# Altium PCB ultrasounic.PcbDoc
Units mil, origin at the board's own origin, x right, y up, seen from the top; angles counter-clockwise.
Board outline 2965 x 1700 mil, 4 copper layers (Top Layer, Mid-Layer 1, Mid-Layer 2, Bottom Layer); 89 components, 55 nets, 285 pads, 123 vias.
Unrouted connection lines stored in the file: 1.
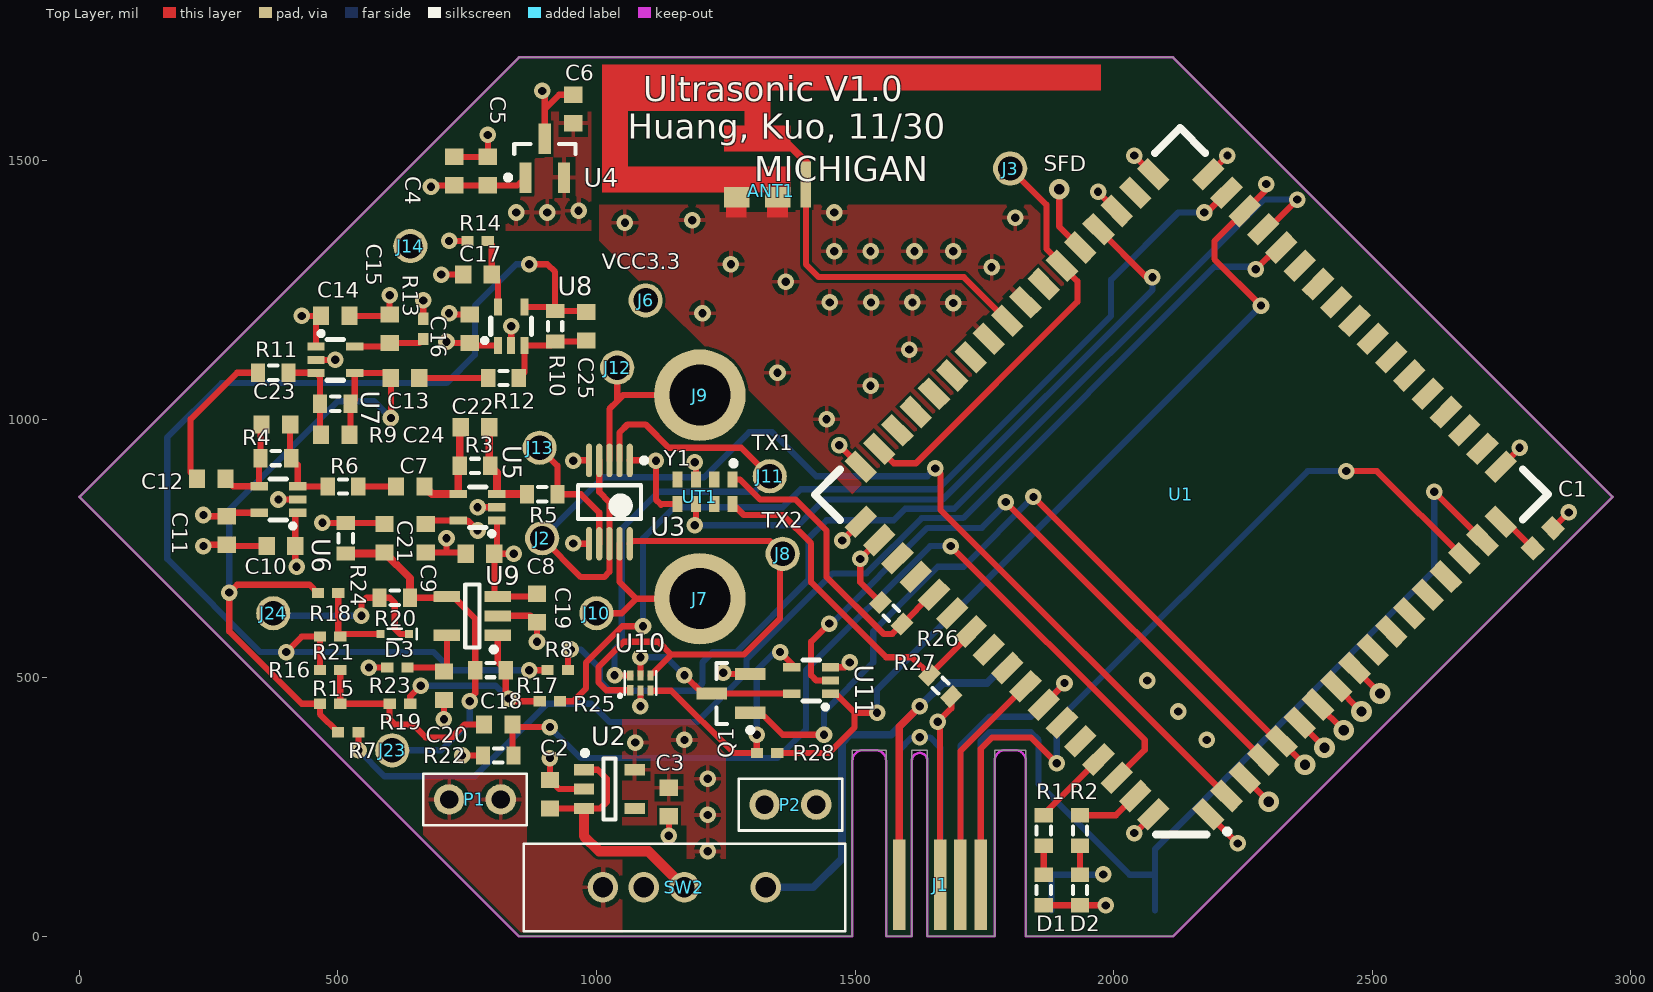
[diagram p0: Top Layer view]
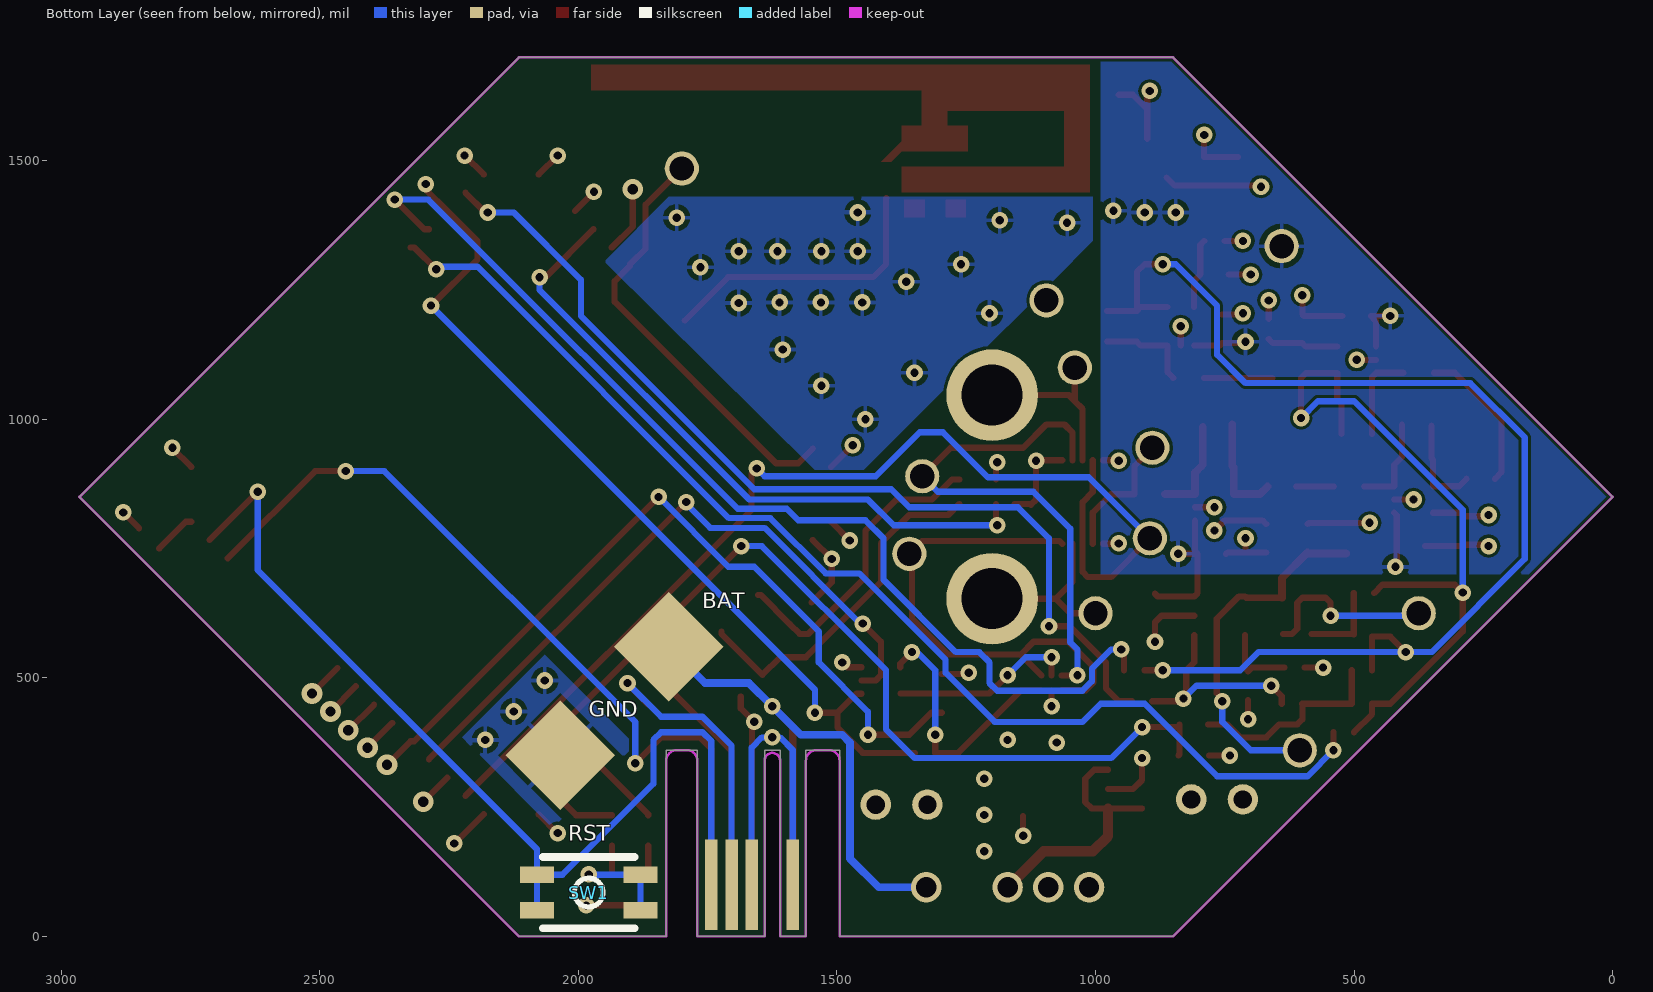
[diagram p1: Bottom Layer view, seen from below]
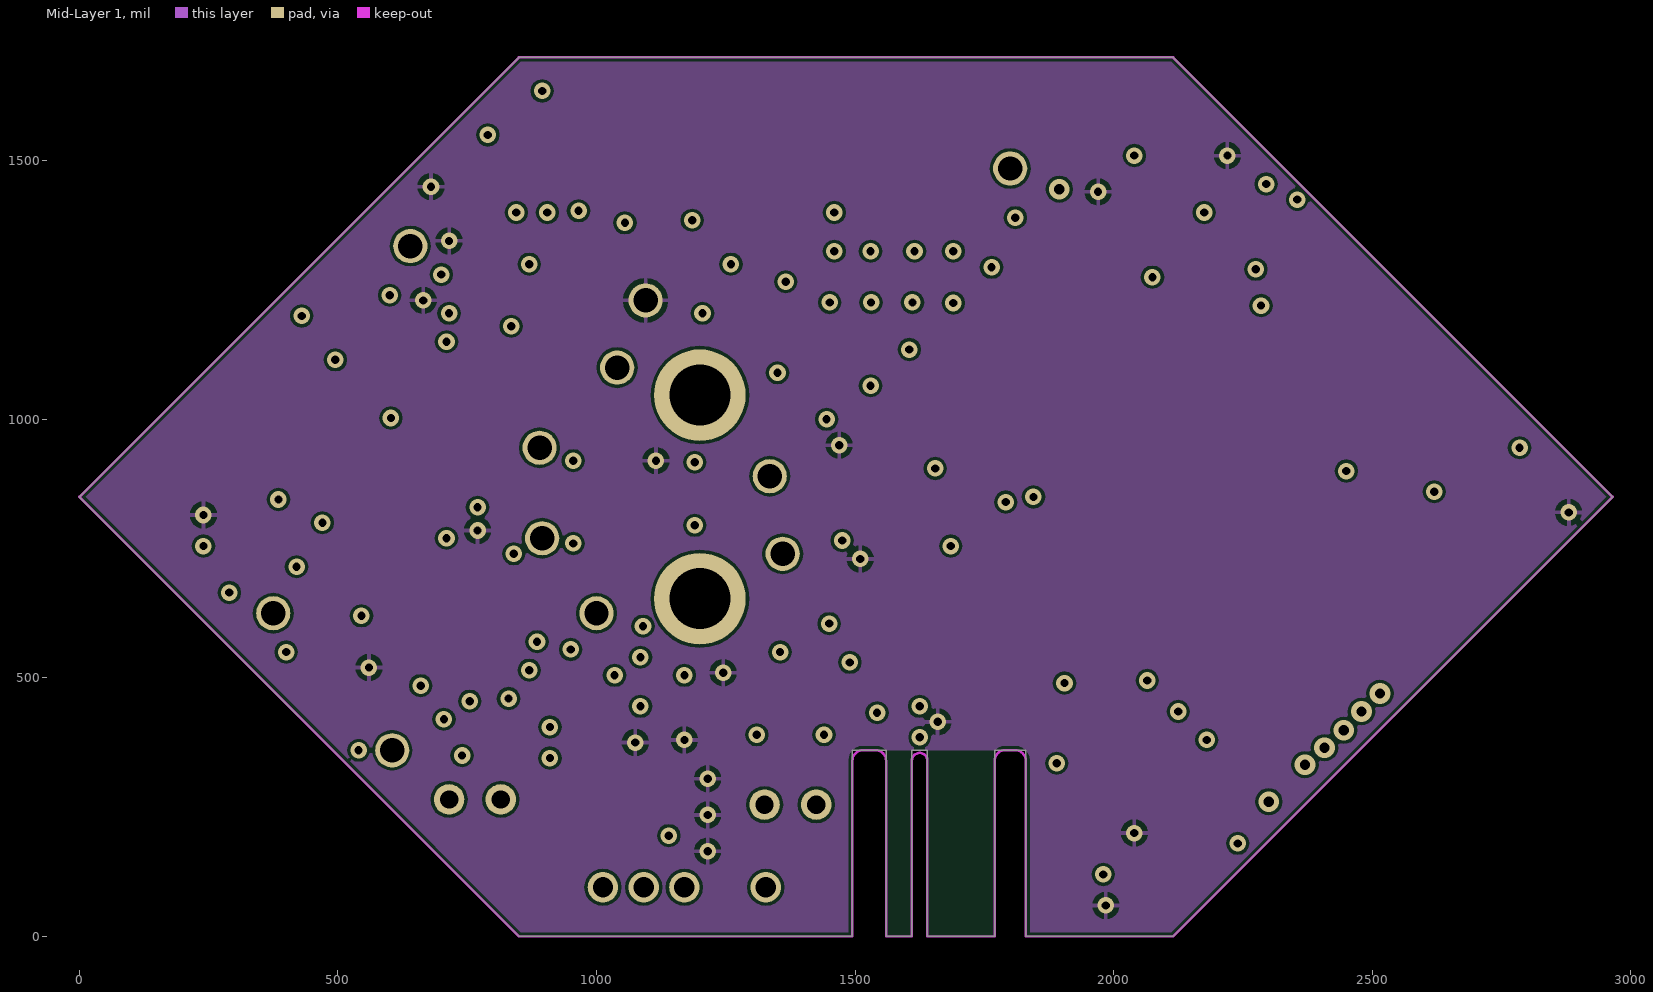
[diagram p2: Mid-Layer 1]
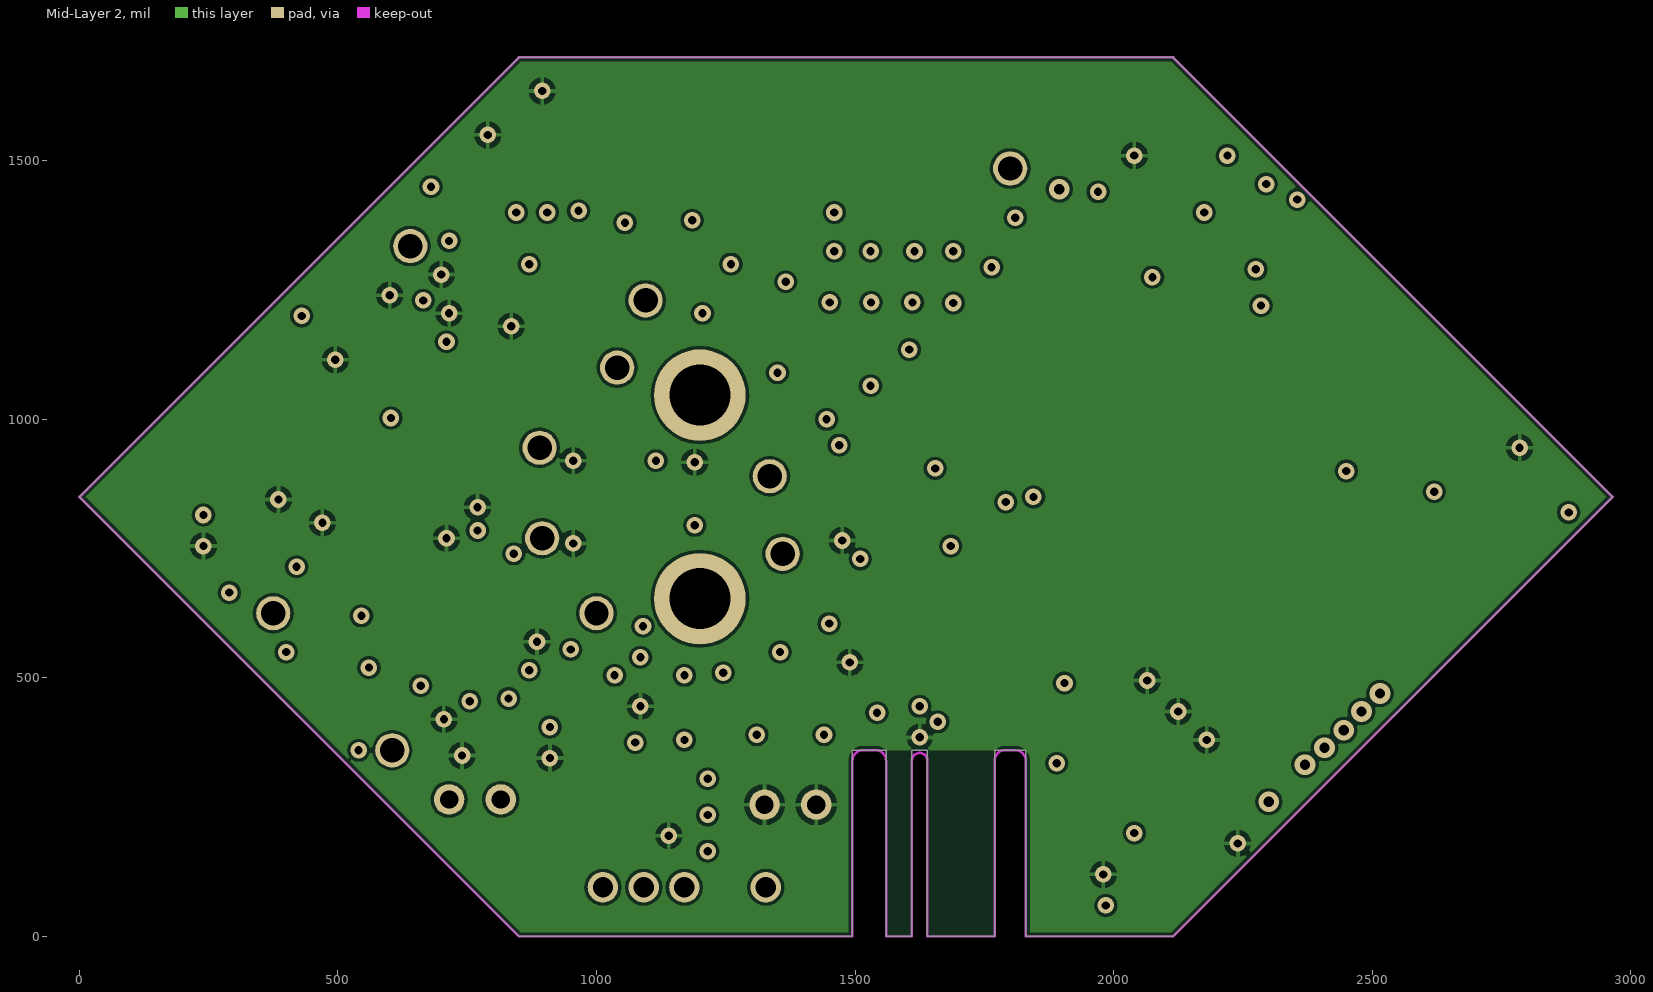
[diagram p3: Mid-Layer 2]

## Layer stack, top to bottom
Top Layer: signal copper 1.4
Dielectric: core 12.6, FR-4, Dk 4.8
Mid-Layer 1: signal copper 1.4
Dielectric: prepreg 12.6, FR-4, Dk 4.8
Mid-Layer 2: signal copper 1.4
Dielectric: core 12.6, FR-4, Dk 4.8
Bottom Layer: signal copper 1.4

## Board outline
0,850 850,0 1495,0 1495,360 1560,360 1560,0 1610,0 1610,360 1640,360 1640,0 1770,0 1770,360 1830,360 1830,0 2115,0 2965,850 2115,1700 850,1700

## Design rules (kind name [scope] priority, off if disabled: settings)
Clearance "Clearance~Sunstone Circuits" [All] p1: gap=6 // Sunstone Circuits Minimum Clearance Rule (MLB~4&6 Layer Designs)
HoleSize "HoleSize~Sunstone Circuits" [All] p1: absolutevalues=TRUE maxlimit=251 minlimit=8 maxpercent=80.000 minpercent=20.000 // Sunstone Circuits Hole Size Rule (MLB~4&6 Layer Designs)
HoleSize Testpoint [All] p2: absolutevalues=TRUE maxlimit=100 minlimit=1 maxpercent=80.000 minpercent=20.000
HoleSize TestPointUsage [All] p3: absolutevalues=TRUE maxlimit=100 minlimit=1 maxpercent=80.000 minpercent=20.000
MinimumAnnularRing "MinimumAnnularRing~Sunstone Circuits" [All] p1: minimumring=7 // Sunstone Circuits Minimum Annular Ring (MLB~4&6 Layer Designs)
PlaneClearance "PlaneClearance~Sunstone Circuits" [All] p1: clearance=12 // Sunstone Circuits Power Plane Clearance Rule (MLB~4&6 Layer Designs)
PlaneConnect "PlaneConnect~Sunstone Circuits" [All] p1: planeconnectstyle=Relief reliefexpansion=10 reliefentries=4 reliefconductorwidth=8 reliefairgap=10 // Sunstone Circuits Power Plane Connect Rule (MLB~4&6 Layer Designs)
PolygonConnect "PolygonConnect~Sunstone Circuits" [All] p1: connectstyle=Relief reliefconductorwidth=8 reliefentries=4 polygonreliefangle="90 Angle" airgapwidth=10 // Sunstone Circuits Polygon Connect Style (MLB~4&6 Layer Designs)
RoomDefinition ultrasounic_tx [InComponentClass('ultrasounic_tx')] p1 off: confinementstyle=ConfineIn formatcopy=TRUE lockcomponents=FALSE outline 1029.65,449.41 1029.65,527.41 1129.29,527.41 1129.29,546.93 1540.71,546.93 1540.71,385.2 1379.21,385.2 1379.21,321.38 1260.79,321.38 1260.79,385.2 1129.29,385.2 1129.29,449.41
RoomDefinition ultrasounic_rx [InComponentClass('ultrasounic_rx')] p2 off: confinementstyle=ConfineIn formatcopy=TRUE lockcomponents=FALSE outline 195.79,851.38 195.79,918.62 210.4,918.62 210.4,1034.9 315.79,1034.9 315.79,1123.62 427.87,1123.62 427.87,1185.12 435.79,1185.12 435.79,1233.62 566.38,1233.62 566.38,1234.21 710.79,1234.21 710.79,1313.62 722.6,1313.62 722.6,1370.75 817.4,1370.75 817.4,1359.9 930,1359.9 930,1239.21 953.62,1239.21 953.62,1124.9 990,1124.9 990,1005.1 985,1005.1 985,440.1 869.21,440.1 869.21,316.38 665,316.38 665,300.1 545.4,300.1 545.4,424.25 437.6,424.25 437.6,554.25 437.6,565.1 315.4,565.1 315.4,725.79 251.38,725.79 251.38,851.38
RoomDefinition ultrasounic [InComponentClass('ultrasounic')] p3 off: confinementstyle=ConfineIn formatcopy=TRUE lockcomponents=FALSE outline 580.4,1275.1 580.4,1394.9 691.38,1394.9 691.38,1539.21 809.29,1539.21 809.29,1593.74 921.38,1593.74 921.38,1659.21 988.62,1659.21 988.62,1352.13 1701.15,1352.13 1701.15,351.76 698.84,351.76 698.84,1275.1
RoomDefinition power [InComponentClass('power')] p4 off: confinementstyle=ConfineIn formatcopy=TRUE lockcomponents=FALSE outline 652.5,202.5 652.5,327.5 876.38,327.5 876.38,334.21 936.26,334.21 936.26,374.72 1035.4,374.72 1035.4,1289.9 1155,1289.9 1155,319.21 1173.62,319.21 1173.62,317.5 1487.5,317.5 1487.5,192.01 1493.39,192.01 1493.39,-2.01 846.61,-2.01 846.61,202.5
RoomDefinition epic [InComponentClass('epic')] p5 off: confinementstyle=ConfineIn formatcopy=TRUE lockcomponents=FALSE outline 835.4,710.1 835.4,829.9 1000.83,829.9 1000.83,1695.59 1985.39,1695.59 1985.39,1589.64 2882.36,1589.64 2882.36,835.64 2895.64,835.64 2895.64,704.36 2882.36,704.36 2882.36,103.34 2126.07,103.34 2126.07,-1.4 1833.93,-1.4 1833.93,-0.5 1560.62,-0.5 1560.62,103.34 1396.06,103.34 1396.06,545.1 1325.4,545.1 1325.4,710.1
RoutingVias "RoutingVias~Sunstone Circuits" [All] p1: holewidth=16 width=30 viastyle="Through Hole" minholewidth=8 minwidth=24 maxholewidth=20 maxwidth=40 // Sunstone Circuits Routing Vias Rule (MLB~4&6 Layer Designs)
ShortCircuit "ShortCircuit~Sunstone Circuits" [All] p1: allowed=FALSE // Sunstone Circuits Short Circuit Rule~Do Not Allow (MLB~4&6 Layer Designs)
SilkscreenOverComponentPads [All] p1: minsilkscreentomaskgap=10
SolderMaskExpansion "SolderMaskExpansion~Sunstone Circuits_1" [IsVia] p1: expansion=-20 // Sunstone Circuits Solder Mask Expansion Rule (MLB~4&6 Layer Designs)
SolderMaskExpansion "SolderMaskExpansion~Sunstone Circuits" [All] p2: expansion=3 // Sunstone Circuits Solder Mask Expansion Rule (MLB~4&6 Layer Designs)
ViasUnderSMD "ViasUnderSMD~Sunstone Circuits" [All] p1: allowed=FALSE // Sunstone Circuits Vias Under SMD~Do Not Allow (MLB~4&6 Layer Designs)
Width "Width~Sunstone Circuits" [All] p1: maxlimit=100 minlimit=6 preferedwidth=10 // Sunstone Circuits Minimum Width Rule (MLB~4&6 Layer Designs)
23 further rules are at their usual default settings.

## Classes and differential pairs
component class ultrasounic: C4 C5 C6 J7 J8 J9 J10 J11 J12 J13 J14 U3 U4 UT1
component class ultrasounic_tx: Q1 R28 U10 U11
component class ultrasounic_rx: C7 C8 C9 C10 C11 C12 C13 C14 C15 C16 C17 C18 C19 C20 C21 C22 C23 C24 C25 D3 J23 J24 R3 R4 R5 R6 R7 R8 R9 R10 R11 R12 R13 R14 R15 R16 R17 R18 R19 R20 R21 R22 R23 R24 R25 U5 U6 U7 U8 U9
component class power: C2 C3 J6 P1 P2 SW2 U2
component class epic: ANT1 C1 D1 D2 J1 J2 J3 R1 R2 R26 R27 SW1 U1 Y1

## Components (designator, comment, footprint, x,y, rotation, side; value= is the part's Value field where it differs from the comment)
ANT1 "2.4GHz PCB Antenna" PIFA-2.4GHz 1375,1410 r90 top
C1 "Cap Semi" 1608[0603] 2830,770 r225 top
C2 "Cap Semi" 1608[0603] 910,275 r270 top
C3 "Cap Semi" 1608[0603] 1140,260 r90 top
C4 "Cap Semi" 1608[0603] 725,1480 r270 top
C5 "Cap Semi" 1608[0603] 790,1480 r270 top
C6 "Cap Semi" 1608[0603] 955,1600 r270 top
C7 "Cap Semi" 1608[0603] 640,870 r0 top
C8 "Cap Semi" 1608[0603] 775,740 r0 top
C9 "Cap Semi" 1608[0603] 670,770 r90 top
C10 "Cap Semi" 1608[0603] 390,755 r0 top
C11 "Cap Semi" 1608[0603] 285,785 r90 top
C12 "Cap Semi" 1608[0603] 255,885 r0 top
C13 "Cap Semi" 1608[0603] 630,1080 r180 top
C14 "Cap Semi" 1608[0603] 495,1200 r180 top
C15 "Cap Semi" 1608[0603] 600,1175 r270 top
C16 "Cap Semi" 1608[0603] 755,1175 r270 top
C17 "Cap Semi" 1608[0603] 770,1280 r0 top
C18 "Cap Semi" 1608[0603] 810,410 r180 top
C19 "Cap Semi" 1608[0603] 885,635 r90 top
C20 "Cap Semi" 1608[0603] 705,485 r90 top
C21 "Cap Semi" 1608[0603] 590,770 r270 top
C22 "Cap Semi" 1608[0603] 765,985 r0 top
C23 "Cap Semi" 1608[0603] 380,990 r0 top
C24 "Cap Semi" 1608[0603] 495,970 r180 top
C25 "Cap Semi" 1608[0603] 980,1180 r270 top
D1 "LED3" J1-0603 1865,90 r90 top
D2 "LED3" J1-0603 1935,90 r90 top
D3 "Diode" SOD523 610,585 r180 top
J1 "EPIC_PROG_EDGE" EPIC_PROG_EDGE 1625,100 r0 top
J2 "5004" TestPoint 895,770 r0 top
J3 "5004" TestPoint 1800,1485 r0 top
J6 "5004" TestPoint 1095,1230 r0 top
J7 "ED90088" "0360 SER" 1200,653.15 r0 top
J8 "5004" TestPoint 1360,740 r0 top
J9 "ED90088" "0360 SER" 1200,1046.85 r0 top
J10 "5004" TestPoint 1000,625 r0 top
J11 "5004" TestPoint 1335,890 r0 top
J12 "5004" TestPoint 1040,1100 r0 top
J13 "5004" TestPoint 890,945 r0 top
J14 "5004" TestPoint 640,1335 r0 top
J23 "5004" TestPoint 605,360 r0 top
J24 "5004" TestPoint 375,625 r0 top
P1 "1 x 2 header" "1x2 header" 765,265 r180 top
P2 "1 x 2 header" "1x2 header" 1375,255 r180 top
Q1 "ZXM61P03" SOT23-3N 1260,470 r180 top
R1 "470" J1-0603 1865,205 r270 top
R2 "470" J1-0603 1935,205 r270 top
R3 "1Meg" J1-0603 765,910 r180 top
R4 "1Meg" J1-0603 380,925 r180 top
R5 "100K" J1-0603 895,855 r180 top
R6 "100K" J1-0603 510,870 r180 top
R7 "0" 0402 520,395 r0 top
R8 "0" 0402 925,515 r0 top
R9 "1Meg" J1-0603 495,1030 r0 top
R10 "1Meg" J1-0603 920,1180 r90 top
R11 "100K" J1-0603 375,1090 r0 top
R12 "100K" J1-0603 820,1080 r0 top
R13 "0" 0402 665,1175 r90 top
R14 "0" 0402 770,1345 r180 top
R15 "0" 0402 485,450 r0 top
R16 "0" 0402 485,515 r0 top
R17 "0" J1-0603 795,515 r0 top
R18 "0" 0402 480.98,663.99 r180 top
R19 "0" 0402 620,450 r180 top
R20 "0" J1-0603 610,655 r180 top
R21 "0" 0402 485,580 r180 top
R22 "0" J1-0603 810,350 r0 top
R23 "0" 0402 615,520 r180 top
R24 "0" J1-0603 515,770 r270 top
R25 "0" 0402 910,455 r0 top
R26 "10K" J1-0603 1665,485 r135 top
R27 "10K" J1-0603 1570,625 r315 top
R28 "0" 0402 1330,355 r0 top
SW1 "EVQP2" EVQP2 1980,85 r0 bottom
SW2 "SSJ1304" SSJ1304 1170,95 r180 top
U1 "EPIC_COREA" EPIC_LCC68 2130,855 r135 top
U2 "ADP162" TSOT23-5 1025,285 r0 top
U3 "TS3A24159" TSSOP50P490X110-10N 1025,840 r270 top
U4 "ISL60002" SOT23-3N 900,1505 r90 top
U5 "MIC861" SC70-6 770,830 r90 top
U6 "MIC861" SC70-6 385,845 r90 top
U7 "MIC861" SC70-6 495,1115 r270 top
U8 "MIC861" SC70-6 835,1180 r0 top
U9 "AS1976" SOT23-5 760,620 r180 top
U10 "NLX2G14" ULLGA6 1085,490 r0 top
U11 "SN74AUP1G08" SC70-6 1415,495 r90 top
UT1 "400EP250" Transducer 1200,850 r90 top
Y1 "RV-4162-C7" RV4162 1210,860 r180 top

## Footprints (in the part's own frame and the unit in brackets; to place one, negate y for a bottom-side part, rotate by r counter-clockwise, add the part's x,y. Pads: shape width x height; smd on the part's side, far side on the other; paste and mask are expansions set on the pad)
"1x2 header" [mm] "1x2 header, 100 mils"
  round 1.5 hole 0.9: 1(-1.27,0) 2(1.27,0)
  silkscreen extent -2.54,-1.27 2.54,1.27, body extent -2.53,-1.26 2.53,1.26, height 8.38
"0360 SER" [mm] "PIN RECEPTACLES"
  round 4.5 hole 3: 1(0,0)
0402 [mm] "Chip Capacitor, Body 1.0x0.5mm, IPC High Density"
  rect 0.6x0.5 smd: 1(-0.5,0) 2(0.5,0)
  body extent -0.55,-0.3 0.55,0.3, height 1.3
1608[0603] [mm] "Chip Capacitor, Body 1.6x0.8mm, IPC High Density"
  rect 0.8x0.9 smd: 1(-0.7,0) 2(0.7,0)
  body extent -0.87,-0.47 0.87,0.47, height 1.3
EPIC_LCC68 [mil]
  rect 60x30 smd: 1(-475,400) 2(-475,350) 3(-475,300) 4(-475,250) 5(-475,200) 6(-475,150) 7(-475,100) 8(-475,50) 9(-475,0) 10(-475,-50) 11(-475,-100) 12(-475,-150) 13(-475,-200) 14(-475,-250) 15(-475,-300) 16(-475,-350) 17(-475,-400)
  rect 30x59.84 smd: 18(-400,-475) 19(-350,-475) 20(-300,-475) 21(-250,-475) 22(-200,-475) 23(-150,-475) 24(-100,-475) 25(-50,-475) 26(0,-475) 27(50,-475) 28(100,-475) 29(150,-475) 30(200,-475) 31(250,-475) 32(300,-475) 33(350,-475) 34(400,-475) 52(400,475) 53(350,475) 54(300,475) 55(250,475) 56(200,475) 57(150,475) 58(100,475) 59(50,475) 60(0,475) 61(-50,475) 62(-100,475) 63(-150,475) 64(-200,475) 65(-250,475) 66(-300,475) 67(-350,475) 68(-400,475)
  rect 59.84x30 smd: 35(475,-400) 36(475,-350) 37(475,-300) 38(475,-250) 39(475,-200) 40(475,-150) 41(475,-100) 42(475,-50) 43(475,0) 44(475,50) 45(475,100) 46(475,150) 47(475,200) 48(475,250) 49(475,300) 50(475,350) 51(475,400)
  silkscreen extent -530,-502 502,501, body extent -448,-448 448,453, height 118
EPIC_PROG_EDGE [mm] "EPIC Programming edge"
  rect 0.61x4.445 smd: 1(-1,0) 3(1,0) 5(2,0) 7(3,0)
  rect 0.61x4.445 smd far side: 2(-1,0) 4(1,0) 6(2,0) 8(3,0)
EVQP2 [mm] "EVQP2 Switch"
  rect 1.68x0.81 smd: 1(-2.54,-0.87) 2(2.54,-0.87) 3(-2.54,0.87) 4(2.54,0.87)
  silkscreen extent -2.25,-1.75 2.25,1.75, body extent -2.25,-1.75 2.25,1.75, height 4
J1-0603 [mm] "Chip Resistor, Body 1.6x0.8mm, IPC High Density"
  rect 0.7x0.9 smd: 1(-0.75,0) 2(0.75,0)
  silkscreen extent -0.2,-0.35 0.2,0.35, body extent -0.85,-0.48 0.85,0.48, height 0.9
PIFA-2.4GHz [mm]
  rect 1x1.25 smd mask-10: cold(0.5,2.625)
  rect 1x1.25 smd paste+0 mask-10: cold(0.5,0.625)
  rect 2.25x0.5 smd mask-10: hot(1.125,-0.75)
  Top Layer region: 0.75,0 2,0 2,8 4.75,8 4.75,2.25 4,2.25 4,3.25 2.75,3.25 2.75,0 2.25,-0.5 2.25,-1 3.25,0 4,0 4,1 5.75,1 5.75,-15.25 7,-15.25 7,9.25 0.75,9.25
RV4162 [mm] "RTC"
  rect 0.5x0.8 smd: 1(-1.35,-0.6) 2(-0.45,-0.6) 3(0.45,-0.6) 4(1.35,-0.6) 5(1.35,0.6) 6(0.45,0.6) 7(-0.45,0.6) 8(-1.35,0.6)
  body extent -1.6,-0.75 1.6,0.75, height 0.8
SC70-6 [mm]
  rect 0.4x0.85 smd: 1(-0.65,-0.95) 2(0,-0.95) 3(0.65,-0.95) 4(0.65,0.95) 5(-0.65,0.95)
  silkscreen extent -1.4,-0.8 1,0.4, body extent -0.9,-0.6 0.9,0.6, height 0.8
SOD523 [mm] "SOD523 Diodes"
  rect 0.4x0.4 smd: 1(0.7,0) 2(-0.7,0)
  silkscreen extent -1.07,-0.25 0.35,0.25, body extent -0.65,-0.45 0.65,0.45, height 0.8
SOT23-3N [mm] "SOT23, 3-Leads, Body 2.9x1.3mm, Pitch 0.95mm, Lead Span 2.5mm, IPC Medium Density"
  rect 1.5x0.6 smd: 1(-0.95,0.95) 2(-0.95,-0.95) 3(0.95,0)
  silkscreen extent -1.07,-1.5 0.7,1.92, body extent -0.7,-1.5 0.7,1.5, height 1.1
SOT23-5 [mm] "SOT23, 5-Leads, Body 2.9x1.6mm, Pitch 0.95mm, Lead Span 2.8mm, IPC High Density"
  rect 1.3x0.55 smd: 1(-1.25,0.95) 2(-1.25,0) 3(-1.25,-0.95) 4(1.25,-0.95) 5(1.25,0.95)
  silkscreen extent -1.18,-1.55 0.35,1.77, body extent -0.67,-1.5 0.65,1.5, height 1.45
SSJ1304 [mm] "Slide Switch"
  round 1.5 hole 1: 1(-4,0) 2(0,0) 3(2,0) 4(4,0)
  silkscreen extent -7.9,-2.15 7.9,2.15
TestPoint [mm]
  round 1.68 hole 1.2: 1(0,0)
  body extent -1.26,-1.27 1.27,1.27, height 4.57
Transducer [mm] "10mm pitch"
  round 2.5 hole 1.7: 1(-5,0) 2(5,0)
  body extent -12.4,-12.48 12.5,12.48, height 17
TSOT23-5 [mm] "SOT23, 6-Leads, Body 3.0x2.9mm (max), Pitch 0.95mm, IPC Medium Density"
  rect 1x0.55 smd: 1(-1.25,0.95) 2(-1.25,0) 3(-1.25,-0.95) 4(1.25,-0.95) 5(1.25,0.95)
  silkscreen extent -1.32,-1.5 0.3,1.9, body extent -0.87,-1.5 0.87,1.5, height 1
TSSOP50P490X110-10N [mm] "TSSOP, 10-Leads, Body 3.1x3.1mm (max), Pitch 0.50mm, IPC Medium Density"
  oval 1.65x0.3 smd: 1(-2.05,1) 2(-2.05,0.5) 3(-2.05,0) 4(-2.05,-0.5) 5(-2.05,-1) 6(2.05,-1) 7(2.05,-0.5) 8(2.05,0) 9(2.05,0.5) 10(2.05,1)
  silkscreen extent -2.17,-1.55 0.82,1.83, body extent -1.55,-1.55 1.55,1.55, height 1.1
ULLGA6 [mm] "ULLGA6 1.45x1.0, 0.5P  CASE 613AF"
  rect 0.3x0.53 smd: 1(-0.5,-0.355)
  rect 0.3x0.49 smd: 2(0,-0.375) 3(0.5,-0.375) 4(0.5,0.375) 5(0,0.375) 6(-0.5,0.375)
  silkscreen extent -1.02,-0.65 0.77,0.58, body extent -0.72,-0.5 0.72,0.5, height 0.4

## Part data
C1 C2 C3 C4 C5 C6 C7 C8 C9 C10 C11 C12 C13 C14 C15 C16 C17 C18 C19 C20 C21 C22 C23 C24 C25: "Capacitor (Semiconductor SIM Model)"
D1 D2: "Typical BLUE SiC LED"
D3: "Default Diode"
J1: "EPIC Programming edge"
J2 J3 J6 J8 J10 J11 J12 J13 J14 J23 J24: library part TestPoint, "TEST POINT PC MINI .040\"D YELLOW"
J7 J9: "PIN RECEPTACLES"
P1 P2: "100 mils standard header"
Q1: "30V P-CHANNEL ENHANCEMENT MODE MOSFET"
R1 R2 R3 R4 R5 R6 R7 R8 R9 R10 R11 R12 R13 R14 R15 R16 R17 R18 R19 R20 R21 R22 R23 R24 R25 R26 R27 R28: library part Res3, "Resistor"
SW1: "Switch"
SW2: "3 position slide switch"
U1: "EPIC Core"
U2: "Ultralow Quiescent Current,  150 mA, CMOS Linear Regulators"
U3: "DUAL-CHANNEL 2:1 MULTIPLEXER/DEMULTIPLEXER"
U4: "Precision Low Power FGA? Voltage References"
U5 U6 U7 U8: "Teeny, Ultra Low Power Op Amp"
U9: "Ultra-Low Current, 1.8V Comparators"
U10: "Dual Schmitt-Trigger  Inverter"
U11: "LOW-POWER SINGLE 2-INPUT POSITIVE-AND GATE"
UT1: library part Tranducer, "Air Ultrasounic Ceramic Transducers"
Y1: "Real Time Clock Module with I2C Bus"

## Free pads (board coordinates)
  rect 150x150 smd far side rot 45: 0(1825,560) 0(2035,350)

## Via types
v1: diameter 32, hole 16, Top Layer to Bottom Layer, 116 vias
v2: diameter 40, hole 20, Top Layer to Bottom Layer, 7 vias

## Nets (pads, with @x,y where several pads share a name; then routed paths per layer and width w, separated by ;. In a path a pad name is that pad's centre, name@x,y a point inside that pad or via, vN(x,y) a via of type N, cw(c..) or ccw(c..) an arc to the next point about the centre after c; other vN are vias at no path point)
AMP1_OUT: C7.2 C22.1 R3.2 U5.4 | length 207.1
  Top Layer w15: C7.2 681.97,855.59 U5.4 732.6,907.13 R3.2 C22.1@735.47,990.47
AMP2_OUT: C12.2 C23.1 R4.2 U6.4 | length 189.6
  Top Layer w12: C12.2 296.97,870.59 U6.4 347.6,922.13 R4.2 C23.1@350.47,988.03
AMP3_OUT: C13.2 C24.1 R7.1 R9.2 R15.1 R18.2 U7.4 | length 1406.9
  Top Layer w12: R18.2 445.28,680 305,680 v1(290,665) 290,590 430,450 R15.1 465.32,430 R7.1 ; C24.1@524.53,971.97 R9.2 532.4,1037.87 U7.4 593.03,1089.41 C13.2 v1(602.44,1002.56)
  Bottom Layer w12: v1(290,665) 290,825 500,1035 570,1035 v1(602.44,1002.56)
AMP4_OUT: C25.1 R8.1 R10.2 R16.1 R21.2 U8.4 | length 2348.9
  Top Layer w12: v1(400,550) 430,580 R21.2 R16.1 ; U8.4 912.13,1217.4 R10.2 ; v1(870,515) R8.1 ; v1(870,1300) 905,1300 920,1285 R10.2 ; C25.1@978.03,1209.53 R10.2
  Bottom Layer w12: v1(870,515) 720,515 685,550 v1(400,550) 350,550 170,730 170,965 275,1070 710,1070 765,1125 765,1220 845,1300 v1(870,1300)
COMP_OUT: R17.2 R19.1 R25.1 U9.1 | length 417.4
  Top Layer w12: R19.1 639.68,464.68 v1(660,485) ; U9.1 809.21,530.32 R17.2 824.53,465.47 v1(830,460) 835,455 R25.1
  Bottom Layer w12: v1(660,485) 805,485 v1(830,460)
GND: C2.1 C3.1 C4.1 C5.1 C6.1 C8.1 C9.1 C10.1 C11.1 C14.1 C15.1 C16.1 C17.1 C19.1 C20.1 C21.1 J1.2 J1.4 P2.1 P2.2 pad.0@2035,350 R22.1 R24.1 SW1.1 SW1.3 U1.1 U1.18 U1.35 U1.52 U2.2 U3.5 U3.6 U4.3 U5.2 U6.2 U7.2 U8.2 U9.2 U10.2 U11.3 Y1.3 | length 2514.8
  Top Layer w12: v1(240,755) 242.44,757.44 C11.1 287.44,755 C10.1 ; v1(385,845) U6.2 ; U7.2 v1(495,1115) ; v1(470,800) 470.47,799.53 R24.1 588.03,799.53 C21.1 ; C14.1 597.44,1200 C15.1 v1(600,1240) ; C9.1 710,742.44 ; v1(700,1280) C17.1 ; v1(705,420) C20.1 ; v1(710,770) 710,742.44 ; v1(715,1205) 717.44,1202.56 C16.1 ; C4.1 C5.1 v1(790,1550) ; v1(740,350) R22.1 ; C8.1 745,742.44 710,742.44 ; v1(770,830) U5.2 ; U9.2 872.44,620 C19.1 v1(885,570) ; U8.2 v1(835,1180) ; v1(895,1635) 900,1630 900,1600 ; U4.3 900,1600 ; v1(910,345) C2.1 927.56,285 U2.2 ; v1(955,760) 955.71,759.29 U3.6 ; v1(955,920) 955.71,920.71 U3.5 ; C6.1 927.56,1627.56 900,1600 ; v1(1085,445) U10.2 ; v1(1140,195) C3.1 ; v1(1190,917) 1192.28,914.72 Y1.3 ; U11.3 1480.59,520.59 v1(1490,530) ; v1(1475,765.69) U1.52 ; v1(2040,1510) 2076.28,1473.72 U1.35 ; U1.1 2239.31,180 v1(2240,180) ; U1.18 2785,944.31 v1(2785,945)
  Bottom Layer w12: J1.2 1585.63,359.37 1585,360 1610,385 v1(1625,385) 1645,385 1665,365 1665,100.63 J1.4 ; SW1.3 SW1.1 1979.25,119.25 v1(1980,120)
  other v1: 2180,380 2125,435 2065,495
NetANT1_cold: ANT1.cold U1.42 U1.44
  other v1: 1445,1000 1530,1065 1350,1090 1605,1135 1205,1205 1690,1225 1451,1226 1531,1226 1611,1226 1366,1266 1764,1294 1260,1300 1460,1325 1530,1325 1615,1325 1690,1325 1055,1380 1185,1385 1810,1390 1460,1400
NetANT1_hot: ANT1.hot U1.43 | length 562
  Top Layer w12: ANT1.hot@1404.53,1427.53 1405,1427.06 1405,1300 1430,1275 1710,1275 U1.43
NetC1_2: C1.2 U1.17 | length 83.1
  Top Layer w12: U1.17 2759.06,801.97 C1.2
NetC7_1: C7.1 R6.1 | length 72.9
  Top Layer w12: R6.1 C7.1
NetC12_1: C12.1 R11.1 | length 287.9
  Top Layer w12: C12.1 215,897.44 215,1000 305,1090 R11.1
NetC13_1: C13.1 R12.1 | length 132.9
  Top Layer w12: C13.1 R12.1
NetC15_2: C15.2 R13.1 U7.5 | length 138.7
  Top Layer w12: U7.5 593.15,1140.59 C15.2 657.13,1147.44 R13.1
NetC17_2: C17.2 R14.1 U8.5 | length 135.8
  Top Layer w12: R14.1 797.56,1337.13 C17.2 809.41,1268.15 U8.5
NetC18_1: C18.1 R22.2 U1.66 | length 1790.9
  Top Layer w12: C18.1 837.56,351.97 R22.2 ; C18.1@842.56,405 v1(910,405) ; v1(1685,755) 2060,380 2060,360.74 U1.66
  Bottom Layer w12: v1(910,405) 970,345 1350,345 1405,400 1405,515 1645,755 v1(1685,755)
NetC18_2: C18.2 R15.2 R16.2 R19.2 | length 398.1
  Top Layer w12: R16.2 R15.2 R19.2 600,449.69 600,420 610,410 645,410 670,385 720,385 745,410 C18.2
NetC20_2: C20.2 R23.1 U9.5 | length 145.8
  Top Layer w12: R23.1 697.56,520 C20.2 710.79,518.35 U9.5
NetC21_2: C21.2 J23.1 R17.1 R20.1 R24.2 U9.4 | length 705.1
  Top Layer w12: R20.1 708.39,655 U9.4 722.6,657.4 765.47,614.53 R17.1 765.47,470.47 755,460 v1(755,455)
  Top Layer w15: R24.2 588.03,740.47 C21.2 639.53,692.91 R20.1
  Bottom Layer w12: J23.1 700,360 755,415 v1(755,455)
NetC22_2: C22.2 R3.1 R5.2 U5.3 | length 191.1
  Top Layer w15: R3.1@792.56,911.97 C22.2 ; R3.1 807.4,897.13 U5.3 864.88,855.59 R5.2
NetC23_2: C23.2 R4.1 R6.2 U6.3 | length 181.1
  Top Layer w12: R4.1@407.56,926.97 C23.2 ; R4.1 422.4,912.13 U6.3 422.99,870 R6.2
NetC24_2: C24.2 R9.1 R11.2 U7.3 | length 174
  Top Layer w12: R11.2 457.01,1090 U7.3 465.47,1081.54 R9.1 C24.2@465.47,971.97
NetC25_2: C25.2 R10.1 R12.2 U8.3 | length 187.9
  Top Layer w12: R12.2 860.59,1091.06 U8.3 912.13,1142.6 R10.1 C25.2@978.03,1150.47
NetD1_2: D1.2 R1.2 | length 55.9
  Top Layer w12: D1.2 R1.2
NetD2_2: D2.2 R2.2 | length 55.9
  Top Layer w12: D2.2 R2.2
NetD3_1: D3.1 R18.1 R21.1 | length 162.2
  Top Layer w12: R18.1 500.66,584.02 501.64,585 D3.1
NetD3_2: D3.2 J24.1 R20.2 | length 345.3
  Top Layer w12: v1(545.47,620) 545.47,645.47 555,655 R20.2 600,655 610,645 610,595 620,585 D3.2
  Bottom Layer w12: J24.1@380,620 v1(545.47,620)
NetJ7_1: J7.1 J10.1 U3.9 UT1.1 | length 331.1
  Top Layer w12: J10.1 1048.7,625 1076.85,653.15 ; U3.9 1044.69,685.31 1076.85,653.15 ; J7.1 1076.85,653.15
NetJ9_1: J9.1 J12.1 U3.3 UT1.2 | length 350.4
  Top Layer w12: U3.3 1025,1020 1040,1035 ; J12.1 1040,1035 ; J9.1 1051.85,1046.85 1040,1035
NetR1_1: R1.1 U1.65 | length 151.7
  Top Layer w12: R1.1 1865,236.45 U1.65
NetR2_1: R2.1 U1.67 | length 122
  Top Layer w12: R2.1 2004.5,234.53 U1.67
NetR28_1: R28.1 U10.3 U11.4 | length 513.8
  Top Layer w12: U10.3 1144.76,475.24 1265,355 R28.1 1310,355.32 v1(1310,390) ; v1(1355,550) 1377.6,527.4 U11.4
  Bottom Layer w12: v1(1310,390) 1310,515 1345,550 v1(1355,550)
NetU1_4: U1.4 U11.2 | length 1300.7
  Top Layer w12: v1(1450,605) 1415,570 1415,505 1425,495 U11.2 ; v1(1791.45,840) U1.4
  Bottom Layer w12: v1(1450,605) 1455,605 1640,790 1745,790 1791.45,836.45 v1(1791.45,840)
OP1_NEGIN: J13.1 R5.1 U3.7 | length 260.1
  Top Layer w12: J13.1 924.53,910.47 R5.1 970,855 1005.32,819.68 U3.7
P1.2: R7.2 U1.30 | length 2311.5
  Top Layer w12: R7.2 539.69,360.31 v1(540,360) ; v1(2275,1290) 2317.3,1332.3 U1.30
  Bottom Layer w12: v1(540,360) 590,310 765,310 905,450 990,450 1025,415 1195,415 1290,510 1290,535 1457,702 1521.6,702 1628.6,809 1709,809 2195,1295 2270,1295 v1(2275,1290)
P1.5: R8.2 U1.31 | length 2048.2
  Top Layer w12: R8.2 944.69,549.69 v1(950,555) ; U1.31 2297.65,1367.65 v1(2355,1425)
  Bottom Layer w12: v1(950,555) 970,555 1007,518 1007,493.4 1025.4,475 1190,475 1205,490 1205,530 1225,550 1270,550 1410,690 1410,770 1445,805 1575,805 1597,827 1692,827 2290,1425 v1(2355,1425)
P1.7: R25.2 U1.33 | length 1865.9
  Top Layer w12: R25.2 955,455 980,480 980,530 1050,600 v1(1090,600) ; v1(2175,1400) 2180.03,1400 U1.33
  Bottom Layer w12: v1(1090,600) 1090,770 1150,830 1360,830 1395,865 1660,865 1995,1200 1995,1270 2125,1400 v1(2175,1400)
PWM: R28.2 U1.32 U11.1 | length 1712.5
  Top Layer w12: R28.2@1349.53,355 1450,355 1499.21,404.21 1499.21,432.6 ; U11.1 1462.4,469.41 1499.21,432.6 ; v1(1542.6,432.6) 1499.21,432.6 ; v1(2285,1220) 2195,1310 2195,1344.26 U1.32 2295,1444.26 v1(2295,1455)
  Bottom Layer w12: v1(1542.6,432.6) 1542.6,477.6 v1(2285,1220)
R\S\T: J1.8 SW1.2 SW1.4 U1.16 | length 1951
  Top Layer w12: v1(2620,860) U1.16
  Bottom Layer w12: J1.8 1743.11,378.11 1760,395 1840,395 1855,380 1855,295 2030.75,119.25 SW1.2 ; SW1.4 SW1.2 ; v1(2620,860) 2620,708.5 2080,168.5 SW1.2
R\T\C\_\I\N\T\: U1.38 Y1.6 | length 1283.3
  Top Layer w12: v1(1190,795) 1192.28,797.28 Y1.6 ; U1.38 2063.55,1275 v1(2075,1275)
  Bottom Layer w12: v1(1190,795) 1390,795 1440,845 1670,845 2075,1250 v1(2075,1275)
SCL: R26.2 U1.58 Y1.8 | length 678.6
  Top Layer w12: Y1.8 1284.53,815 1360,815 1415,760 1415,685 1560,540 1610,540 R26.2 1723.41,585.17 U1.58
SDA: R27.2 U1.56 Y1.1 | length 597.3
  Top Layer w12: Y1.1 1277.64,883.62 1316.33,844.93 1385.07,844.93 1445,785 1445,695 1555,585 1571.76,585 R27.2 1647.3,660.55 U1.56
SFD: J3.1 U1.40 U1.50 | length 836.1
  Top Layer w12: U1.50 1575.03,915 1617.87,915 1930,1227.13 1930,1267.13 U1.40 1900.19,1299.81 1870,1330 1870,1415 J3.1
T\X\_\G\A\T\E\: Q1.1 U1.5 | length 1556.8
  Top Layer w12: Q1.1 1317.4,432.6 1360,390 v1(1440,390) ; v1(1845,850) 2317.3,377.7 U1.5 v2(2370,332.16)
  Bottom Layer w12: v1(1440,390) 1440,435 1535,530 1535,590 1660,715 1710,715 v1(1845,850)
TCK: J1.7 U1.15 | length 1568.6
  Top Layer w12: J1.7 1743.11,363.11 1765,385 1840,385 v1(1890,335) ; v1(2450,900) 2509.26,900 U1.15
  Bottom Layer w12: v1(1890,335) 1890,415 2375,900 v1@2440,900
TX/RX_SELECT: J2.1 U1.2 U3.4 U3.8 | length 2142.1
  Top Layer w12: J2.1 970,695 1015,695 1025,705 U3.8 1025,840 1005.32,859.68 U3.4 ; v1(1655,905) 1665.03,894.97 1665.03,825 U1.2
  Bottom Layer w12: J2.1 1013,888 1208,888 1295,975 1340,975 1425,890 1640,890 v1(1655,905)
TX_1: J11.1 U3.2 U10.6 | length 1040.1
  Top Layer w12: v1(1035,505) 1035.24,504.76 U10.6 ; U3.2 1044.69,974.69 1060,990 1095,990 1140,945 1280,945 J11.1
  Bottom Layer w12: v1(1035,505) 1035,555 1048.7,568.7 1048.7,788.7 1120,860 1305,860 J11.1
TX_2: J8.1 U3.10 U10.1 U10.4 | length 996.5
  Top Layer w12: U3.10 1070.08,765 1335,765 1355,745 1355,615 1285,545 1144.92,545 ; U10.1 1018.98,476.02 1003.98,491.02 1003.98,521.26 1052.72,570 1119.92,570 1144.92,545 ; U10.4 1144.92,545
UART1_RX: J1.6 U1.62 | length 578.5
  Top Layer w12: U1.62 1905,488.58 v1(1905,490)
  Bottom Layer w12: J1.6 1703.74,368.74 1760,425 1840,425 v1(1905,490)
UART1_TX: J1.5 U1.61 | length 435.9
  Top Layer w12: J1.5 1703.74,358.03 U1.61
VBAT: J1.1 pad.0@1825,560 SW2.1 | length 1133.2
  Top Layer w15: J1.1 1585.63,405.63 v1(1625,445)
  Bottom Layer w15: SW2.1 1419.14,95 1475,150.86 1475,375 1490,390 1570,390 v1(1625,445) 1670,490 1755,490 pad.0@1790,525
VCC3.3: C1.1 C3.2 C4.2 C5.2 C9.2 C11.2 D1.1 D2.1 J1.3 J6.1 Q1.2 R13.2 R14.2 R23.2 R26.1 R27.1 U1.34 U1.37 U1.51 U1.53 U1.68 U2.5 U3.1 U4.1 U5.5 U6.5 Y1.5 | length 1651.6
  Top Layer w12: v1(240,815) 242.44,812.56 C11.2 291.85,819.41 U6.5 ; v1(560,520) R23.2 ; R13.2 v1(665,1230) ; C9.2 676.85,804.41 U5.5 750.59,804.41 v1(770,785) ; v1(680,1450) 682.44,1452.44 C4.2 C5.2 847.44,1452.44 U4.1 ; v1(715,1345) R14.2 ; U3.1 1114.29,920.71 v1(1115,920) 1115,845 1125,835 1126.38,836.38 Y1.5 ; v1(1245,510) 1247.6,507.4 Q1.2 ; v1(1469.31,950) U1.51 ; v1(1510,730) 1510,685 R27.1 ; v1(1510,730) U1.53 ; J1.3 1664.37,410.63 v1(1660,415) 1685.88,440.88 R26.1 ; D1.1 D2.1 1984.53,60.47 v1(1985,60) ; v1(1970,1440) 1970,1439.26 U1.37 ; v1(2040,200) 2040.69,200 U1.68 ; U1.34 2219.31,1510 v1(2220,1510) ; C1.1 v1(2880,820)
  other v1: 1215,165 1215,235 1215,305 1075,375 1170,380
VCC_GATE: Q1.3 U10.5 U11.5 | length 356.2
  Top Layer w12: U10.5 v1(1085,540) ; v1(1170,505) 1205,470 Q1.3 U11.5@1377.01,470
  Bottom Layer w12: v1(1085,540) 1135,540 v1(1170,505)
VHEADER: P1.1 P1.2 SW2.4
VREF: C6.2 C8.2 C10.2 C14.2 C16.2 C19.2 J14.1 U4.2 U5.1 U6.1 U7.1 U8.1 U9.3 | length 578
  Top Layer w12: v1(420,715) 417.56,717.44 C10.2 417.56,814.57 U6.1 ; v1(430,1200) C14.2 457.6,1190.16 U7.1 ; v1(710,1150) 712.56,1147.44 C16.2 759.84,1142.6 U8.1 ; U5.1 807.4,744.84 C8.2 ; v1(840,740) C8.2 ; C19.2 879.84,657.4 U9.3 802.56,664.06 C8.2
  other v1: 845,1400 905,1400 965.33,1403.21
VSUPPLY: C2.2 SW2.2 U2.1 U2.3 | length 500.3
  Top Layer w12: C2.2 910.16,247.6 U2.3 1007.6,247.6 1020,260 1020,305 1002.6,322.4 U2.1
  Top Layer w20: U2.3 975.79,194.21 1005,165 1100,165 SW2.2
pads on no net: SW2.3 U1.3 U1.6 U1.7 U1.8 U1.9 U1.10 U1.11 U1.12 U1.13 U1.14 U1.19 U1.20 U1.21 U1.22 U1.23 U1.24 U1.25 U1.26 U1.27 U1.28 U1.29 U1.36 U1.39 U1.41 U1.45 U1.46 U1.47 U1.48 U1.49 U1.54 U1.55 U1.57 U1.59 U1.60 U1.63 U1.64 U2.4 Y1.2 Y1.4 Y1.7
copper on no net: | length 471.8
  Top Layer w12: v2(1895,1445) 1895,1372.84 1935.55,1332.3 ; 2253.74,306.99 v2(2300,260.74) ; 2359.81,413.06 v2(2407.87,365) ; 2395.16,448.41 v2(2445,398.58) ; 2430.52,483.77 v2(2479.29,435) ; 2465.88,519.12 v2(2515,470)

## Polygon pours and split planes (outlines as drawn)
VCC3.3 on Mid-Layer 1 "Bottom Overlay-No Net" (solid, pour order 10): 0,850 850,1700 2115,1700 2965,850 2960,850 2110,0 1830,0 1830,360 1495,360 1495,0 850,0
GND on Mid-Layer 2 "Bottom Overlay-No Net" (solid, pour order 11): 0,850 850,1700 2115,1700 2965,850 2115,0 1830,0 1830,360 1495,360 1495,0 850,0
GND on Bottom Layer "Bottom Layer-No Net 1" (solid, pour order 12): 2030,510 1890,370 2050,210 2225,385 2065,545
NetANT1_cold on Bottom Layer "Bottom Overlay-No Net" (solid, pour order 16): 1495,855 1005,1345 1005,1430 1825,1430 1950,1305
VREF on Bottom Layer "Bottom Overlay-No Net" (solid, pour order 13): 990,1700 990,700 150,700 0,850 850,1700
VHEADER on Top Layer "Bottom Overlay-No Net" (solid, pour order 14): 665,315 665,185 850,0 1050,0 1050,180 865,180 865,315
VCC3.3 on Top Layer "Bottom Layer-No Net 1" (solid, pour order 17): 1050,420 1050,215 1175,215 1175,150 1250,150 1250,420
VREF on Top Layer "Bottom Layer-No Net 1" (solid, pour order 18): 990,1595 900,1595 900,1505 880,1505 880,1430 825,1430 825,1365 990,1365
NetANT1_cold on Top Layer "Bottom Overlay-No Net" (solid, pour order 15): 1495,855 1005,1345 1005,1415 1245,1415 1245,1430 1295,1430 1295,1400 1325,1400 1325,1430 1375,1430 1375,1415 1840,1415 1950,1305

## Keep-outs
Keep-Out Layer:
  lines w4.72: 1610,340 1610,0 1560,0 1560,340 ccw(c1540,340) 1540,360 1515,360 ccw(c1515,340) 1495,340 1495,0 850,0 0,850 850,1700 2115,1700 2965,850 2115,0 1830,0 1830,340 ccw(c1810,340) 1810,360 1790,360 ccw(c1790,340) 1770,340 1770,0 1640,0 1640,340
  lines w5: 1610,340 cw(c1625,340) 1640,340

## Other copper
Top Layer:
  rectangle net NetANT1_cold: 1250,1390 1290,1425
  rectangle net NetANT1_cold: 1330,1390 1370,1425

## Silkscreen, mask and mechanical layers (free items; w line width, h text height)
Top Overlay:
  circle w10: c1265,915 r5
  text "Ultrasonic V1.0" at 1090,1615 h48
  text "Huang, Kuo, 11/30" at 1060.04,1542.87 h48
  text "SFD" at 1865,1480 h30
  text "MICHIGAN" at 1305,1460 h48
  text "VCC3.3" at 1010,1290 h30
  text "TX1" at 1300,940 h30
  text "TX2" at 1320,790 h30
Bottom Overlay:
  text "BAT" at 1760,635 h30
  text "GND" at 1980,425 h30
  text "RST" at 2020,185 h30